# Altium PCB Node_ver2.PcbDoc
Units mm, origin at the board's own origin, x right, y up, seen from the top; angles counter-clockwise.
Board outline 75 x 55 mm, 2 copper layers (Top Layer, Bottom Layer); 51 components, 44 nets, 253 pads, 60 vias.
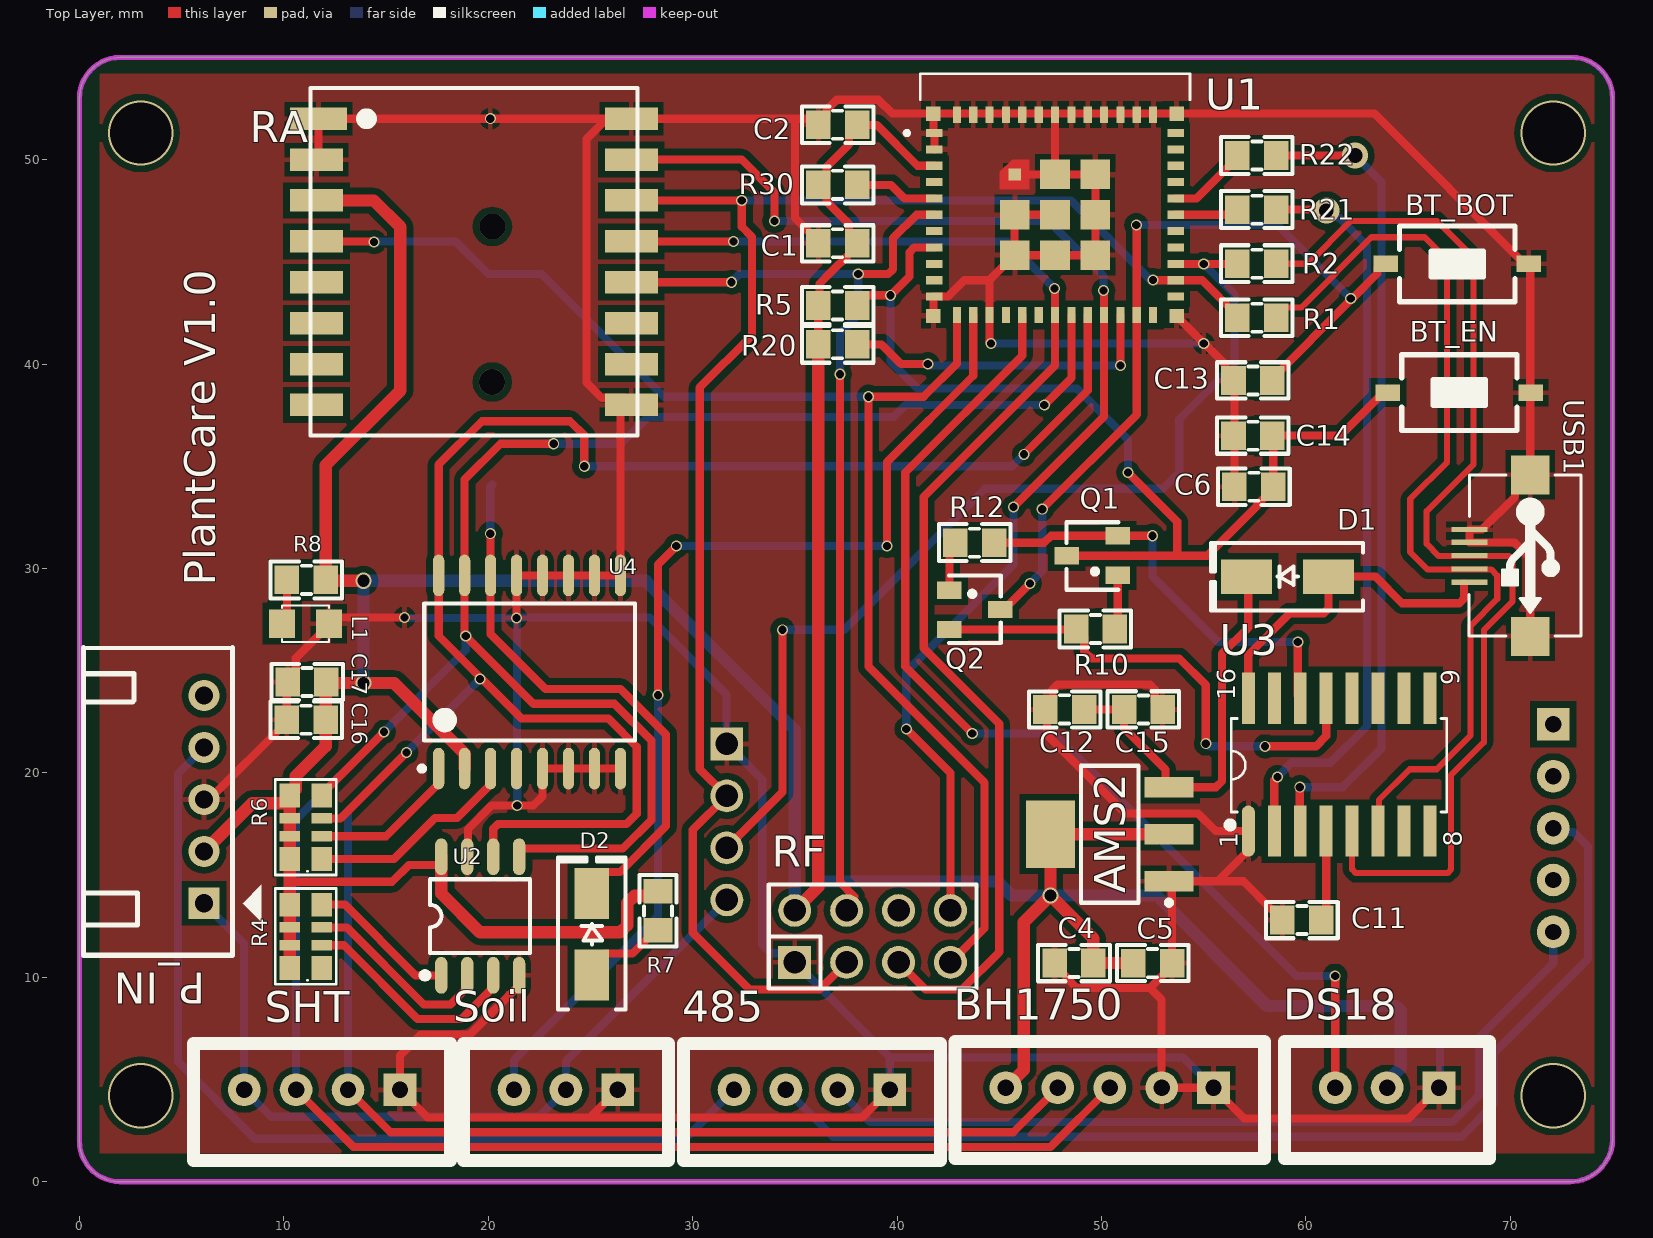
[diagram p0: Top Layer view]
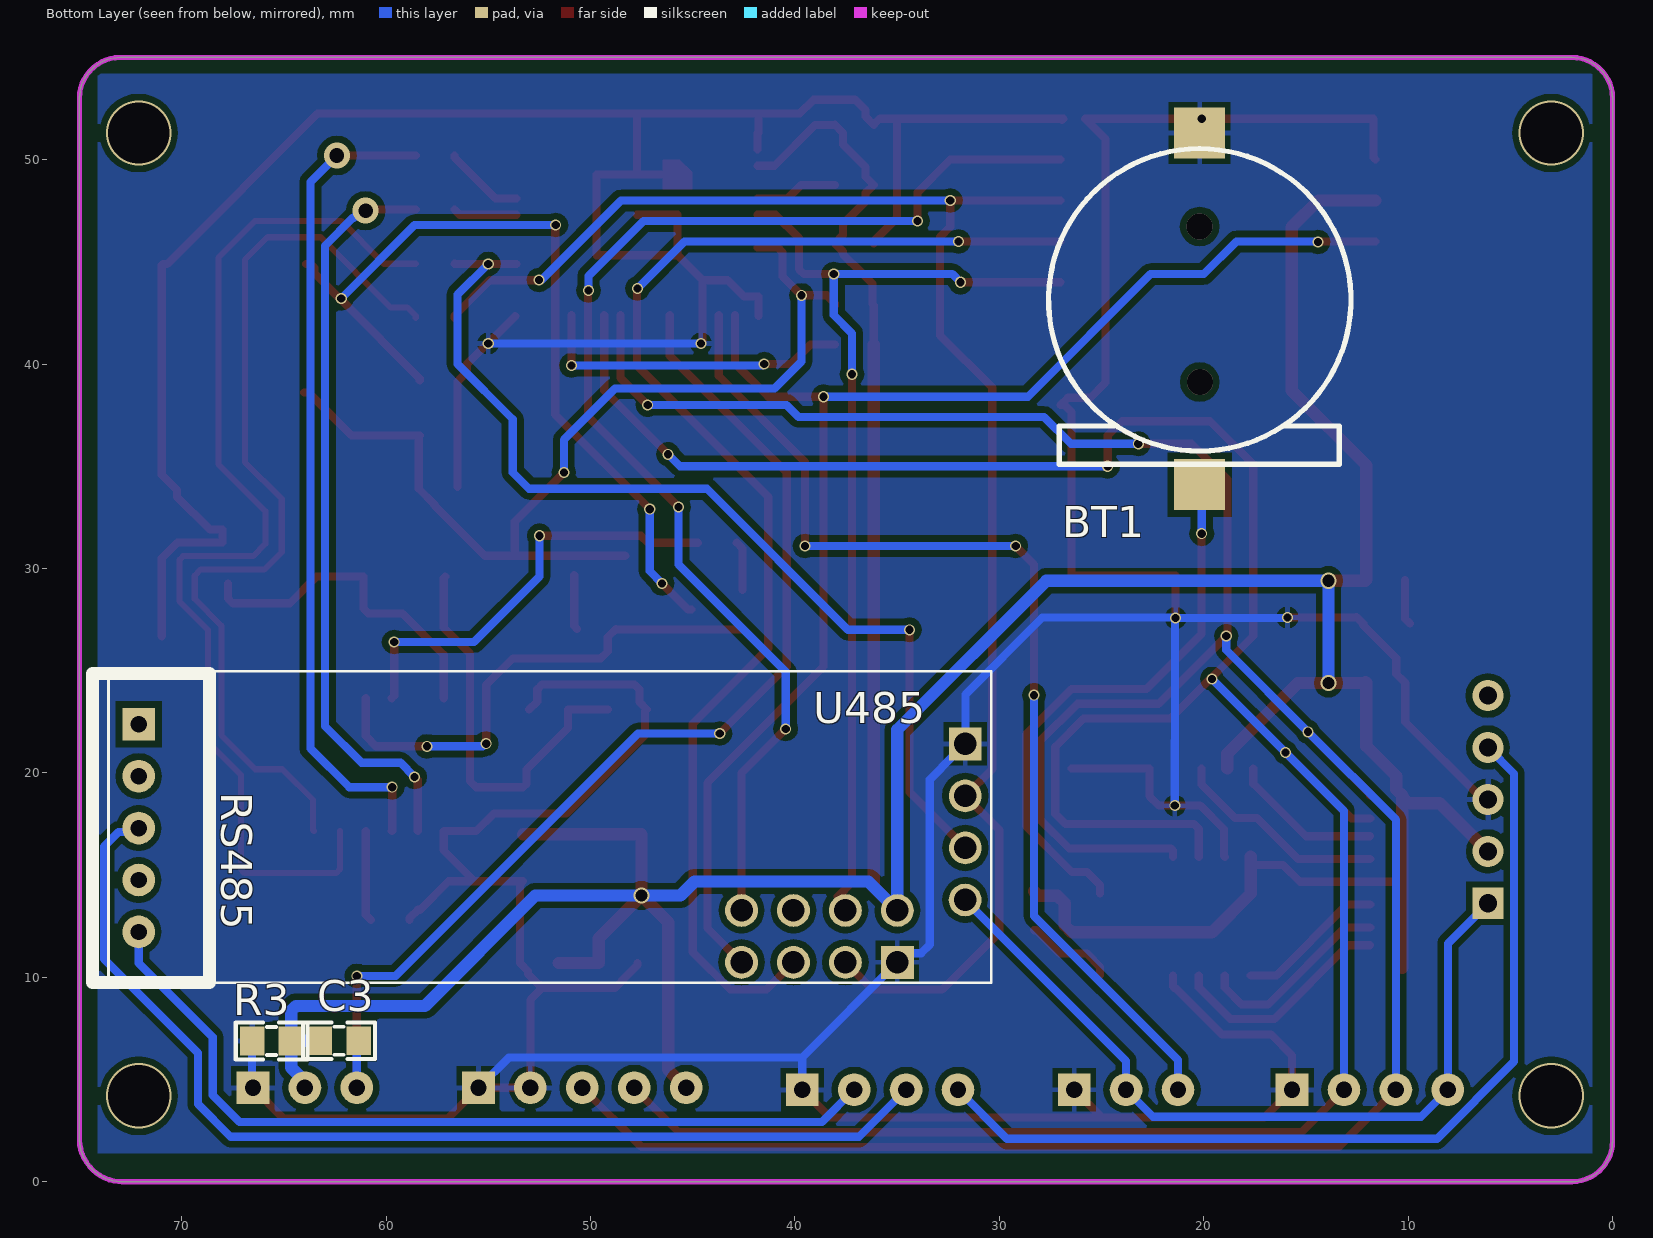
[diagram p1: Bottom Layer view, seen from below]
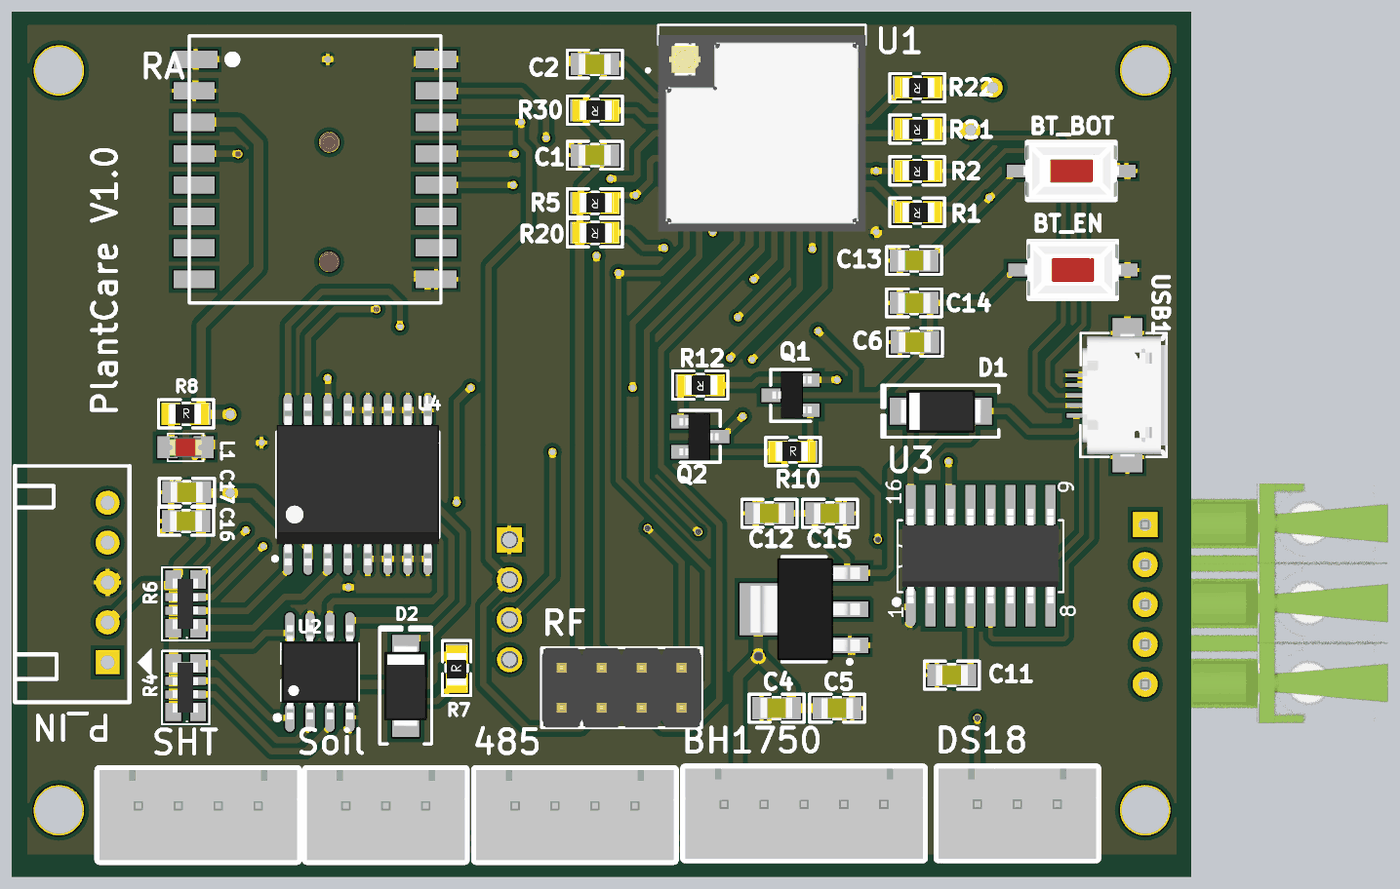
[diagram p2: 3D render of the assembled board from above, using the file's embedded part models]
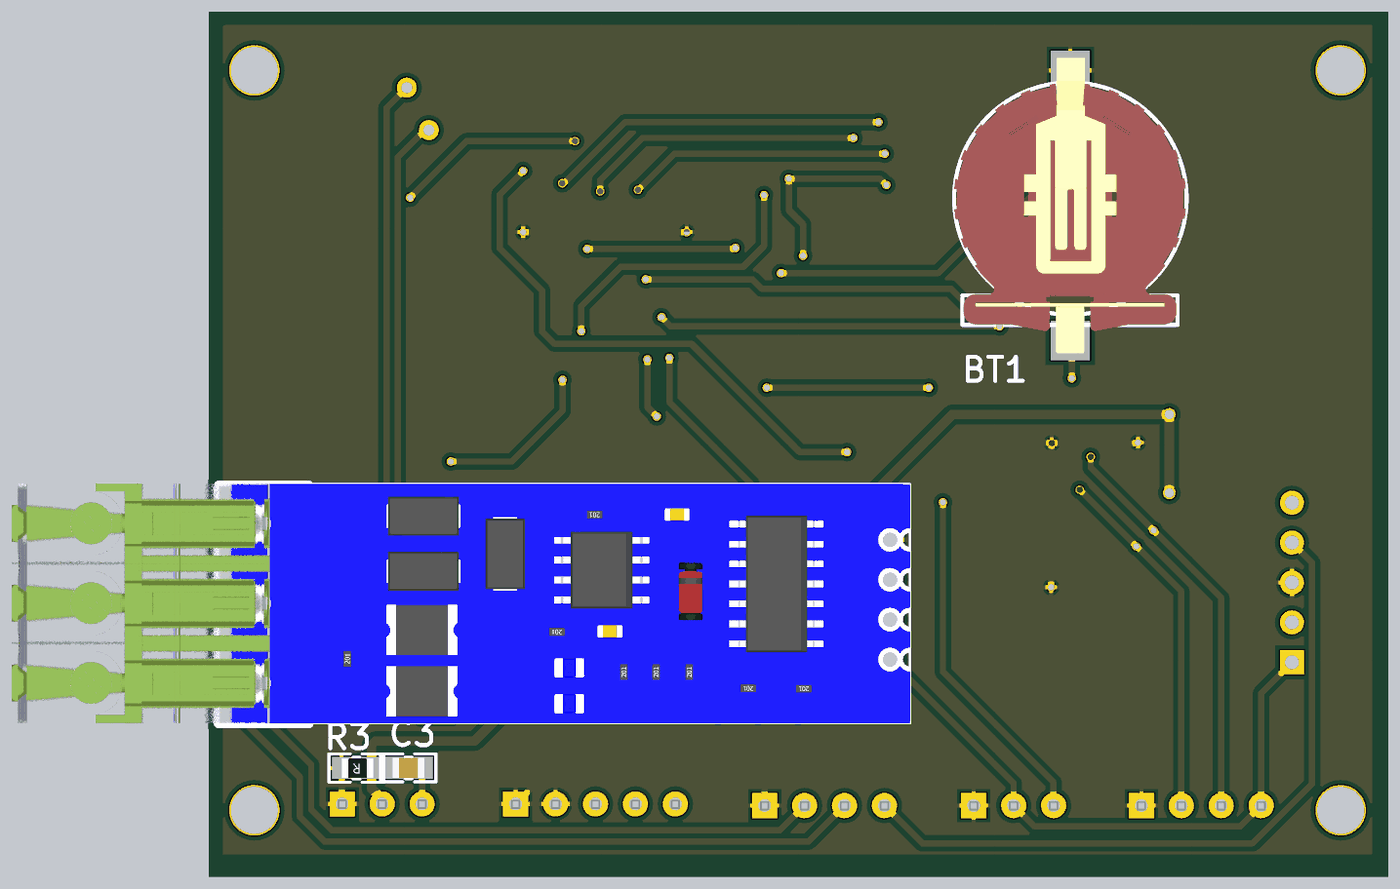
[diagram p3: 3D render of the assembled board from below, using the file's embedded part models]

## Layer stack, top to bottom
Top Solder: solder mask 0.0102, Solder Resist, Dk 3.5
Top Layer: signal copper 0.0356
Dielectric 1: dielectric 0.32, FR-4, Dk 4.8
Bottom Layer: signal copper 0.0356
Bottom Solder: solder mask 0.0102, Solder Resist, Dk 3.5

## Board outline
2,0 cw(c2,2) 0,2 0,53 cw(c2,53) 2,55 73,55 cw(c73,53) 75,53 75,2.047 74.999,2.046 cw(c72.9,2.1) 72.846,0.001 72.9,0

## Design rules (kind name [scope] priority, off if disabled: settings)
Clearance [All] p1: gap=0.32 ignorepadtopadclearanceinfootprint=FALSE
PolygonConnect [All] p1: connectstyle=Relief reliefconductorwidth=0.254 reliefentries=4 polygonreliefangle="90 Angle" airgapwidth=0.254
RoomDefinition Soil_temp [InComponentClass('Soil_temp')] p1: confinementstyle=ConfineIn formatcopy=TRUE lockcomponents=FALSE outline -33.5,-63.8 17.3,-63.8 17.3,-38.4 -33.5,-38.4
RoomDefinition Soil [InComponentClass('Soil')] p2: confinementstyle=ConfineIn formatcopy=TRUE lockcomponents=FALSE outline -33.5,-63.8 17.3,-63.8 17.3,-38.4 -33.5,-38.4
RoomDefinition SHT [InComponentClass('SHT')] p3: confinementstyle=ConfineIn formatcopy=TRUE lockcomponents=FALSE outline -33.5,-63.8 17.3,-63.8 17.3,-38.4 -33.5,-38.4
RoomDefinition RTC [InComponentClass('RTC')] p4: confinementstyle=ConfineIn formatcopy=TRUE lockcomponents=FALSE outline -33.5,-63.8 17.3,-63.8 17.3,-38.4 -33.5,-38.4
RoomDefinition RS485 [InComponentClass('RS485')] p5: confinementstyle=ConfineIn formatcopy=TRUE lockcomponents=FALSE outline -33.5,-63.8 17.3,-63.8 17.3,-38.4 -33.5,-38.4
RoomDefinition RA02 [InComponentClass('RA02')] p6: confinementstyle=ConfineIn formatcopy=TRUE lockcomponents=FALSE outline -33.5,-63.8 17.3,-63.8 17.3,-38.4 -33.5,-38.4
RoomDefinition ESP32C3-MINI [InComponentClass('ESP32C3-MINI')] p7: confinementstyle=ConfineIn formatcopy=TRUE lockcomponents=FALSE outline -33.5,-63.8 17.3,-63.8 17.3,-38.4 -33.5,-38.4
RoomDefinition BH1750 [InComponentClass('BH1750')] p8: confinementstyle=ConfineIn formatcopy=TRUE lockcomponents=FALSE outline -33.5,-63.8 17.3,-63.8 17.3,-38.4 -33.5,-38.4
RoutingCorners [All] p1: cornerstyle=45-Degree minsetback=2 maxsetback=2
RoutingVias [All] p1: holewidth=0.4 width=0.6 viastyle="Through Hole" minholewidth=0.25 minwidth=0.4 maxholewidth=1.1 maxwidth=1.27
SolderMaskExpansion [All] p1: expansion=0.102 istentingtop=FALSE
Width [All] p1: maxlimit=2 minlimit=0.2 preferedwidth=0.4
29 further rules are at their usual default settings.

## Classes and differential pairs
component class Soil: Soil
component class Soil_temp: C3 DS18 R3
component class SHT: SHT
component class RTC: BT1 C16 C17 D2 R4 R6 R7 U2 U4
component class RS485: 485 RS485 U485
component class RA02: RA RF
component class POWER: BT
component class ESP32C3-MINI: AMS2 BT_BOT BT_EN C1 C2 C4 C5 C6 C11 C12 C13 C14 C15 D1 L1 P_IN Q1 Q2 R1 R2 R5 R8 R10 R12 R20 R21 R22 R30 U1 U3 USB1
component class BH1750: BH1750

## Components (designator, comment, footprint, x,y, rotation, side; value= is the part's Value field where it differs from the comment)
485 "Header 4P 2.54 Duc Thang" XH2.54M-4 39.64,4.5 r180 top
AMS2 "AMS1117-3.3V" SOT223 50.4,17 r90 top value="AMS1117-3.3V SOT223"
BH1750 "Header 5P 2.54 Duc Thang" XH2.54M-5 55.48,4.6 r180 top
BT1 "CR1220 SMD" "DE PIN CR1220" 20.2,42.7 r180 bottom
BT_BOT "Nut Nhan 2 Chan SMD 3x6x2.5" "Nut Nhan 2 Chan SMD 3x6x2.5" 67.4,44.9 r0 top
BT_EN "Nut Nhan 2 Chan SMD 3x6x2.5" "Nut Nhan 2 Chan SMD 3x6x2.5" 67.5,38.6 r0 top
C1 "106" "tu 0805" 37.1,45.9 r180 top
C2 "104" "tu 0805" 37.1,51.7 r180 top
C3 "105" "tu 0805" 62.3,6.9 r180 bottom
C4 "106" "tu 0805" 48.654,10.697 r180 top
C5 "104" "tu 0805" 52.5,10.7 r0 top
C6 "105" "tu 0805" 57.454,33.997 r180 top
C11 "104" "tu 0805" 59.8,12.8 r180 top
C12 "106" "tu 0805" 48.2,23.1 r180 top
C13 "105" "tu 0805" 57.4,39.2 r0 top
C14 "105" "tu 0805" 57.4,36.5 r0 top
C15 "104" "tu 0805" 52.046,23.103 r0 top
C16 "104" "tu 0805" 11.1,22.6 r180 top
C17 "104" "tu 0805" 11.14,24.445 r180 top
D1 "SS34" "DIODE SMA" 59.1,29.6 r180 top
D2 "SS34" "DIODE SMA" 25.068,12.108 r90 top
DS18 "Header 3P 2.54 Duc Thang" XH2.54M-3 66.508,4.603 r180 top
L1 "LED 0805" LED-0805-Red 9.914,27.3 r0 top
P_IN "Header 5P 2.54 Duc Cong" "Header 5P DC 2.54" 6.1,13.62 r180 top
Q1 "BC817" SOT-23 49.55,30.613 r90 top value=C9014
Q2 "BC817" SOT-23 43.8,28 r270 top value=C9014
R1 "0R" "tro smd 0805" 57.6,42.2 r180 top
R2 "0R" "tro smd 0805" 57.6,44.846 r180 top
R3 "4.7k" "tro smd 0805" 65.6,6.824 r0 bottom
R4 "4.7k" "tro bang 0603 4" 11.098,11.981 r180 top
R5 "10k" "tro smd 0805" 37.097,42.8 r180 top
R6 "4.7k" "tro bang 0603 4" 11.098,17.315 r180 top
R7 "200R" "tro smd 0805" 28.243,13.251 r90 top
R8 "1k" "tro smd 0805" 11.1,29.5 r0 top
R10 "10k" "tro smd 0805" 49.7,27.1 r0 top
R12 "10k" "tro smd 0805" 43.8,31.2 r180 top
R20 "10k" "tro smd 0805" 37.097,40.9 r180 top
R21 "0R" "tro smd 0805" 57.6,47.493 r180 top
R22 "0R" "tro smd 0805" 57.6,50.139 r180 top
R30 "10k" "tro smd 0805" 37.097,48.7 r180 top
RA "RA-02" RA-02 19.3,45 r0 top
RF "JP 2x4 2.54" "JP 2x4 DT" 38.8,12 r0 top
RS485 "Header 5P 2.54 Duc Thang" XH2.54M-5 72.1,22.38 r270 bottom
SHT "Header 4P 2.54 Duc Thang" XH2.54M-4 15.68,4.5 r180 top
Soil "Header 3P 2.54 Duc Thang" XH2.54M-3 26.34,4.5 r180 top
U1 "ESP32-C3-MINI-1U-N4" XCVR_ESP32-C3-MINI-1U-N4 47.725,47.3 r0 top
U2 "M95080" SOP8_L 19.607,12.997 r90 top
U3 "CH340C" SOIC16_50_284_25X90_SMT 61.6,20.4 r90 top
U4 "DS3231 SMD" "SOIC 16" 22.02,24.935 r90 top
U485 "Module rs485" RS485 62.398,17.734 r180 bottom locked
USB1 "USB Micro 5p SMD" "USB Micro 5p SMD" 68,30.63 r270 top

## Footprints (in the part's own frame and the unit in brackets; to place one, negate y for a bottom-side part, rotate by r counter-clockwise, add the part's x,y. Pads: shape width x height; smd on the part's side, far side on the other; paste and mask are expansions set on the pad)
"DE PIN CR1220" [mm]
  rect 2.5x2.5 smd: 1(0,-8.6) 2(0,8.6)
  silkscreen extent -7.39,-7.6 7.4,7.84, body extent -7.39,-9.42 7.36,9.38, height 4.27
"DIODE SMA" [mm] "SMA"
  rect 2.5x1.7 smd: 1(-2,0) 2(2,0)
  silkscreen extent -3.68,-1.65 3.75,1.65, body extent -2.6,-1.37 2.6,1.37, height 2.4
"Header 5P DC 2.54" [mil]
  rect 60x60 hole 35: 1(0,0)
  round 60 hole 35: 2(0,-100) 3(0,-200) 4(0,-300) 5(0,-400)
  silkscreen extent -110,-492 232,100
"JP 2x4 DT" [mm]
  rect 1.61x1.6 hole 1.1: 1(-3.81,-1.27)
  oval 1.61x1.6 hole 1.1: 2(-1.27,-1.27) 3(1.27,-1.27) 4(3.81,-1.27) 5(3.81,1.27) 6(1.27,1.27) 7(-1.27,1.27) 8(-3.81,1.27)
  silkscreen extent -5.08,-2.54 5.08,2.54, body extent -5.08,-2.54 5.08,2.54, height 8.55
LED-0805-Red [mil]
  rect 50x55 smd: 1(0,0) 2(90,0)
  silkscreen extent 0,-35 90,35, body extent 5,-25 85,25, height 43
"Nut Nhan 2 Chan SMD 3x6x2.5" [mm] "Switch SMD type"
  rect 1.2x0.8 smd: 1(-3.5,0) 2(3.5,0)
  silkscreen extent -2.82,-1.85 2.82,1.85, body extent -3.05,-1.85 3.05,1.85, height 2.5
RA-02 [mm]
  rect 2.8x1.1 smd: 1(-7.6,7)
  rect 2.6x1.1 smd: 2(-7.7,5) 3(-7.7,3) 4(-7.7,1) 5(-7.7,-1) 6(-7.7,-3) 7(-7.7,-5) 8(-7.7,-7) 9(7.7,-7) 10(7.7,-5) 11(7.7,-3) 12(7.7,-1) 13(7.7,1) 14(7.7,3) 15(7.7,5) 16(7.7,7)
  silkscreen extent -8,-8.5 8,8.5
RS485 [mm]
  round 1.6 hole 1.1: 4(30.723,-3.951) 5(30.738,-1.404) 6(30.732,1.139)
  rect 1.6x1.6 hole 1.1: 7(30.736,3.682)
  silkscreen extent -11.18,-8 32,7.24, body extent -25.13,-8 32,7.27, height 19.67
SOIC16_50_284_25X90_SMT [mm]
  oval 2.5x0.635 smd mask+0.076: 1(-3.25,4.42)
  rect 2.5x0.635 smd mask+0.076: 2(-3.25,3.15) 3(-3.25,1.88) 4(-3.25,0.61) 5(-3.25,-0.66) 6(-3.25,-1.93) 7(-3.25,-3.2) 8(-3.25,-4.47) 9(3.25,-4.47) 10(3.25,-3.2) 11(3.25,-1.93) 12(3.25,-0.66) 13(3.25,0.61) 14(3.25,1.88) 15(3.25,3.15) 16(3.25,4.42)
  silkscreen extent -3.07,-5.3 2.26,5.44, body extent -3.02,-4.97 2.98,4.93, height 1.4
"SOIC 16" [mm] "SOIC, 16-Leads, Body 10.30x7.50mm, Pitch 1.27mm, IPC Medium Density"
  oval 2.032x0.55 smd: 1(-4.725,4.445) 2(-4.725,3.175) 3(-4.725,1.905) 4(-4.725,0.635) 5(-4.725,-0.635) 6(-4.725,-1.905) 7(-4.725,-3.175) 8(-4.725,-4.445) 9(4.725,-4.445) 10(4.725,-3.175) 11(4.725,-1.905) 12(4.725,-0.635) 13(4.725,0.635) 14(4.725,1.905) 15(4.725,3.175) 16(4.725,4.445)
  silkscreen extent -4.85,-5.15 3.35,5.39, body extent -5.15,-5.17 5.16,5.16, height 2.48
SOP8_L [mm] "SOIC, 8-Leads, Body 4.9x3.9mm, Pitch 1.27mm, IPC High Density"
  oval 1.8x0.6 smd: 1(-2.9,1.905) 2(-2.9,0.635) 3(-2.9,-0.635) 4(-2.9,-1.905) 5(2.9,-1.905) 6(2.9,-0.635) 7(2.9,0.635) 8(2.9,1.905)
  silkscreen extent -3.2,-2.44 1.8,3, body extent -3.01,-2.45 2.99,2.45, height 1.75
SOT223 [mm]
  rect 1x2.4 smd: 1(-2.3,-2.9) 2(0,-2.9) 3(2.3,-2.9)
  rect 3.3x2.4 smd: 4(0,2.9)
  silkscreen extent -3.47,-3.03 3.35,1.4, body extent -3.25,-3.56 3.25,3.4, height 1.68
SOT-23 [mm] "SOT 23 _ 1-3-2"
  rect 0.85x1.2 smd: 1(-0.94,-1.245) 2(0.986,-1.25) 3(0.005,1.25)
  silkscreen extent -1.65,-1.27 1.65,1.27, body extent -1.47,-1.33 1.53,1.17, height 1.06
"tro bang 0603 4" [mil]
  rect 39.37x45.67 smd: 1(-30,60) 4(-30,-62) 5(32,-62) 8(32,60)
  rect 39.37x20 smd: 2(-30.06,16.08) 3(-30,-18.08) 6(32.06,-18.08) 7(32.06,16.08)
  silkscreen extent -58,-93 60,91, body extent -29,-64 33,62, height 22
"tro smd 0805" [mm]
  rect 1.2x1.4 smd: 1(-0.946,-0.061) 2(0.954,-0.061)
  silkscreen extent -1.75,-0.97 1.75,0.84, body extent -1.56,-0.76 1.44,0.64, height 0.53
"tu 0805" [mm] "Compoment SMD 80x50mil"
  rect 1.2x1.4 smd: 1(-0.946,-0.003) 2(0.954,-0.003)
  silkscreen extent -1.75,-0.89 1.75,0.89, body extent -1.01,-0.64 1.01,0.63, height 0.61
"USB Micro 5p SMD" [mil]
  rect 10x70 smd: 1(51.18,0) 2(25.59,0) 3(0,0) 4(-25.59,0) 5(-50,0)
  rect 74.8x74.8 smd: 5(-155.51,116.84) 5(155.51,116.84)
  silkscreen extent -155,-1 155,215, body extent -157,5 158,218, height 107
XCVR_ESP32-C3-MINI-1U-N4 [mm]
  rect 0.8x0.4 smd: 1(-5.9,4) 2(-5.9,3.2) 3(-5.9,2.4) 4(-5.9,1.6) 5(-5.9,0.8) 6(-5.9,0) 7(-5.9,-0.8) 8(-5.9,-1.6) 9(-5.9,-2.4) 10(-5.9,-3.2) 11(-5.9,-4) 25(5.9,-4) 26(5.9,-3.2) 27(5.9,-2.4) 28(5.9,-1.6) 29(5.9,-0.8) 30(5.9,0) 31(5.9,0.8) 32(5.9,1.6) 33(5.9,2.4) 34(5.9,3.2) 35(5.9,4)
  rect 0.4x0.8 smd: 12(-4.8,-4.9) 13(-4,-4.9) 14(-3.2,-4.9) 15(-2.4,-4.9) 16(-1.6,-4.9) 17(-0.8,-4.9) 18(0,-4.9) 19(0.8,-4.9) 20(1.6,-4.9) 21(2.4,-4.9) 22(3.2,-4.9) 23(4,-4.9) 24(4.8,-4.9) 36(4.8,4.9) 37(4,4.9) 38(3.2,4.9) 39(2.4,4.9) 40(1.6,4.9) 41(0.8,4.9) 42(0,4.9) 43(-0.8,4.9) 44(-1.6,4.9) 45(-2.4,4.9) 46(-3.2,4.9) 47(-4,4.9) 48(-4.8,4.9)
  rect 0.6x0.6 smd paste-1 mask+0: 49_1(-1.975,1.975)
  rect 1.45x1.45 smd: 49_2(0,1.975) 49_3(1.975,1.975) 49_4(1.975,0) 49_5(1.975,-1.975) 49_6(0,-1.975) 49_7(-1.975,-1.975) 49_8(-1.975,0) 49_9(0,0)
  rect 0.7x0.7 smd: 50(5.95,4.95) 51(5.95,-4.95) 52(-5.95,-4.95) 53(-5.95,4.95)
  Top Layer region: -1.25,1.25 -2.7,1.25 -2.7,2.1 -2.1,2.7 -1.25,2.7
  silkscreen extent -7.35,3.9 6.6,6.9, body extent -6.6,-6.25 6.6,6.25, height 2.55
XH2.54M-3 [mm]
  rect 1.6x1.6 hole 0.8: 1(0,0)
  round 1.6 hole 0.8: 2(2.54,0) 3(5.08,0)
  silkscreen extent -2.48,-2.26 7.56,3.46, body extent -2.48,-2.26 7.56,3.48, height 6.91
XH2.54M-4 [mm]
  rect 1.6x1.6 hole 0.8: 1(0,0)
  round 1.6 hole 0.8: 2(2.54,0) 3(5.08,0) 4(7.62,0)
  silkscreen extent -2.48,-2.26 10.1,3.46, body extent -2.48,-2.26 10.1,3.48, height 6.91
XH2.54M-5 [mm]
  rect 1.6x1.6 hole 0.8: 1(0,0)
  round 1.6 hole 0.8: 2(2.54,0) 3(5.08,0) 4(7.62,0) 5(10.16,0)
  silkscreen extent -2.48,-2.26 12.64,3.46, body extent -2.48,-2.26 12.64,3.48, height 6.91

## Part data
485 BH1750 DS18 P_IN RS485 SHT Soil: "Cắm", Chung_Loai=Cắm, Don_Vi=Con
  485 SHT: Ma_Hang=MH001285, Ten_Linh_Kien="Header 4P XH2.54-4P Đực Thẳng"
  BH1750 RS485: Ma_Hang=MH001298, Ten_Linh_Kien="Header 5P XH2.54-5P Đực Thẳng"
  DS18 Soil: Ma_Hang=MH001292, Ten_Linh_Kien="Header 3P XH2.54-3P Đực Thẳng"
  P_IN: Ma_Hang=MH001308, Ten_Linh_Kien="Header 5P XH2.54-5P Đực Cong"
AMS2: library part "AMS1117 SMD", "Dán", Chung_Loai=Dán, Don_Vi=Con, Ma_Hang=MH000596
BT1: library part "De pin CR1220 SMD", Ma_Hang=MH000833, Ten="Đế PIN CR1220 SMD"
C1 C4 C12: library part "Tu 0805 106 16V 10%", "Dán", Chung_Loai=Dán, Don_Vi=Con, Ma_Hang=MH004553, So_Chan=2, Ten_Linh_Kien="Tụ 0805 106-10uF 10% 16V"
C2 C5 C11 C15 C16 C17: library part "Tu 0805 104 50V 10%", "Dán", Chung_Loai=Dán, Don_Vi=Con, Ma_Hang=MH004551, So_Chan=2, Ten_Linh_Kien="Tụ 0805 104-100nF 10% 50V"
C3 C6 C13 C14: library part "Tu 0805 105 50V 10%", "Dán", Chung_Loai=Dán, Don_Vi=Con, Ma_Hang=MH004552, So_Chan=2, Ten_Linh_Kien="Tụ 0805 105-1uF 10% 50V"
D1 D2: library part "Diode SS34 ( 1N5822 )", "Dán", Chung_Loai=Dán, Don_Vi=Con, Ma_Hang=MH002104, Ten_Linh_Kien="Diode SS34 3A 40V SMA ( 1N5822 SS34A)"
L1: library part "LED 0805 Do", "Dán", Chung_Loai=Dán, Don_Vi=Con, Ma_Hang=MH000897, Ten_Linh_Kien="LED 0805 Màu Đỏ (Red)"
Q1 Q2: library part "Trans BC817", "SOT-23 - C8658"
R1 R2 R21 R22: library part "Tro 0805 5% 0R", "Dán", Chung_Loai=Dán, Don_Vi=Con, Ma_Hang=MH005230, So_Chan=2, Ten_Linh_Kien="Trở 0805 5% 0R"
R3: library part "Tro 0805 5% 4.7k", "Dán", Chung_Loai=Dán, Don_Vi=Con, Ma_Hang=MH005307, So_Chan=2, Ten_Linh_Kien="Trở 0805 5% 4.7k"
R4 R6: library part "Tro bang 0603 4.7k", "Dán", Chung_Loai=Dán, Don_Vi=Con, Ma_Hang=MH001448, So_Chan=8, Ten_Linh_Kien="Trở băng 0603x4 4.7k"
R5 R10 R12 R20 R30: library part "Tro 0805 1% 10k", "Dán", Chung_Loai=Dán, Don_Vi=Con, Ma_Hang=MH005473, So_Chan=2, Ten_Linh_Kien="Trở 0805 1% 10k"
R7: library part "Tro 0805 5% 220R", "Dán", Chung_Loai=Dán, Don_Vi=Con, Ma_Hang=MH005259, So_Chan=2, Ten_Linh_Kien="Trở 0805 5% 220R"
R8: library part "Tro 0805 1% 1k", "Dán", Chung_Loai=Dán, Don_Vi=Con, Ma_Hang=MH005468, So_Chan=2, Ten_Linh_Kien="Trở 0805 1% 1k"
RA: "General ISM < 1GHz LoRaâ„¢ Transceiver Module 410MHz ~ 525MHz Antenna Not Included, I-PEX Surface Mount", Package=None, Availability="Not in stock", Check_prices=https://www.snapeda.com/parts/RA-02/AI-Thinker/view-part/?ref=eda, MF=Ai-Thinker, MP=RA-02, Price=None, SnapEDA_Link=https://www.snapeda.com/parts/RA-02/AI-Thinker/view-part/?ref=snap
RF: library part "JP 2x4 2.54 Duc Thang", "Cắm", Chung_Loai=Cắm, Don_Vi=Con, Ma_Hang=MH002686, Ten_Linh_Kien="Jump Đôi Đực 2.54MM 2x40P Thẳng 11MM"
U1: "Bluetooth, WiFi 802.11b/g/n, Bluetooth v5.0 Transceiver Module 2.412GHz ~ 2.484GHz Antenna Not Included, I-PEX Surface Mount", Package=None, Availability="In Stock", Check_prices=https://www.snapeda.com/parts/ESP32-C3-MINI-1U-N4/Espressif+Systems/view-part/?ref=eda, MF="Espressif Systems", MP=ESP32-C3-MINI-1U-N4, Price=None, Purchase-URL=https://pricing.snapeda.com/search/part/ESP32-C3-MINI-1U-N4/?ref=eda, SnapEDA_Link=https://www.snapeda.com/parts/ESP32-C3-MINI-1U-N4/Espressif+Systems/view-part/?ref=snap
U2: library part EEPROM_M95080, "EEPROM_M95080"
U3: library part IC_CH340C, "USB Bridge, USB to UART USB 2.0 UART Interface", Alternate Part Number-1=NA, Case/Package=SOIC16, Manufacturer=Olimex, Supplier Part Number-1=C84681, Manufacturer Part Number=CH340C, Supplier-1=LCSC
U4: "SOIC"
USB1: "USB Type B", Ma_Hang=MH001020, Ten="MicroUSB MK5P SMD"
BT_BOT BT_EN: Ma_Hang=MH001036, Ten="Nút Nhấn 2 Chân 3x6x2.5MM SMD"

## Via types
v1: diameter 0.54, hole 0.4, Top Layer to Bottom Layer, 49 vias
v2: diameter 3.2, hole 3, Top Layer to Bottom Layer, 4 vias
v3: diameter 0.8, hole 0.6, Top Layer to Bottom Layer, 3 vias
v4: diameter 1.27, hole 0.711, Top Layer to Bottom Layer, 2 vias
v5: diameter 1.27, hole 1.27, Top Layer to Bottom Layer, 2 vias

## Nets (pads, with @x,y where several pads share a name; then routed paths per layer and width w, separated by ;. In a path a pad name is that pad's centre, name@x,y a point inside that pad or via, vN(x,y) a via of type N, cw(c..) or ccw(c..) an arc to the next point about the centre after c; other vN are vias at no path point)
BAT_11V6: 485.4 P_IN.4 | length 45.7
  Bottom Layer w0.4: P_IN.4 4.818,19.958 4.818,5.875 8.593,2.1 29.62,2.1 485.4
CHIP_EN: BT_EN.1 C6.1 C14.2 Q1.3 R5.1 U1.8 | length 49.4
  Top Layer w0.4: R5.1 38.043,42.961 38.443,43.361 v1(39.683,43.361) 40.601,44.278 40.601,45.466 40.835,45.7 U1.8 ; Q1.3 49.979,30.618 51.61,30.618 53.7,30.618 ; v1(51.3,34.7) 53.7,32.3 53.7,30.618 ; BT_EN.1 63.8,38.6 61.697,36.497 C14.2 58.4,36.451 C6.1 58.4,33.9 57.62,33.12 57.62,33.085 55.153,30.618 53.7,30.618
  Bottom Layer w0.4: v1(39.683,43.361) 39.683,40.117 41,38.8 48.8,38.8 51.3,36.3 v1(51.3,34.7)
DN: R1.1 U3.6 USB1.2 | length 46
  Top Layer w0.3: R1.1 58.546,42.361 58.946,42.761 59.761,42.761 63.2,46.2 65.8,46.2 66.9,45.1 66.9,35.2 65.1,33.4 65.1,30.8 65.943,29.957 68,29.957 69.054,29.957 69.359,29.652 69.359,28.513 68.054,27.208 68.054,21.836 66.398,20.18 65.077,20.18 63.571,18.674 63.571,17.191 U3.6
DP: R2.1 U3.5 USB1.3 | length 54
  Top Layer w0.3: R2.1 60.107,44.907 62.2,47 66.4,47 68.2,45.2 68.2,35.1 65.9,32.8 65.9,31.2 66.493,30.607 68.739,30.607 69.1,30.607 69.924,30.607 70.1,30.431 70.1,28.377 68.7,26.977 68.7,21.5 67.1,19.9 67.1,15.276 66.924,15.1 62.436,15.1 62.26,15.276 U3.5
DTR: Q2.2 R10.1 U3.13 | length 24.9
  Top Layer w0.4: Q2.2 R10.1@48.679,27.015 ; R10.1 49.154,26.639 49.154,25.946 49.5,25.6 53.8,25.6 55.101,24.299 v1(55.101,21.429) ; v1(58,21.3) 60.49,21.3 60.99,21.8 U3.13
  Bottom Layer w0.4: v1(55.101,21.429) 55.139,21.429 55.268,21.3 v1(58,21.3)
GND: 485.1 AMS2.1 BH1750.1 BH1750.2 BT1.2 BT_BOT.2 BT_EN.2 C1.2 C2.2 C4.2 C5.2 C6.2 C11.2 C12.2 C13.1 C14.1 C15.2 C16.2 C17.2 DS18.1 L1.2 P_IN.3 R3.2 RA.1 RA.2 RA.9 RA.16 RF.1 SHT.1 Soil.1 U1.1 U1.2 U1.11 U1.14 U1.36 U1.37 U1.38 U1.39 U1.40 U1.41 U1.42 U1.43 U1.44 U1.45 U1.46 U1.47 U1.48 U1.49_1 U1.49_2 U1.49_3 U1.49_4 U1.49_5 U1.49_6 U1.49_7 U1.49_8 U1.49_9 U1.50 U1.51 U1.52 U1.53 U2.4 U2.7 U3.1 U4.5 U4.6 U4.7 U4.8 U4.9 U4.10 U4.11 U4.12 U4.13 U485.7 USB1.4 USB1.5 | length 366.3
  Top Layer w0.4: P_IN.3 6.342,18.7 10.146,22.503 C16.2 10.146,24.408 C17.2 10.586,24.848 10.586,25.623 12.2,27.236 L1.2 12.525,27.625 12.55,27.6 v1(15.9,27.6) ; RA.2 11.7,50.1 RA.1 v1(20.1,52) 25.8,52 24.8,51 24.8,39.1 25.55,38.35 26.65,38.35 RA.9 26.815,38 26.465,37.65 U4.9 U4.10 U4.11 U4.12 U4.13 21.376,29.651 v1(21.376,27.576) ; U2.7 19.01,15.935 19.01,17.242 20.168,18.4 v1(21.417,18.4) 22.2,18.4 22.655,18.855 U4.5 U4.6 U4.7 U4.8 ; U2.4 21.512,9.551 21.42,9.459 21.358,9.459 21.062,9.163 21.062,9.157 19.105,7.2 16.7,7.2 15.68,6.18 SHT.1 17.04,3.14 24.98,3.14 ; Soil.1 24.98,3.14 ; RA.16@26.869,52 26.934,51.934 RA.16 35,52 ; C1.2 36.146,46.003 35,47.149 35,52 ; 485.1 38.28,3.14 24.98,3.14 ; U1.52 41.775,43.3 U1.11 42.49,43.3 43.29,44.1 44.525,44.1 ; U1.2 U1.1 41.775,51.3 U1.53 ; v1@44.5,41.1 v1(44.6,41) 44.6,41.038 44.525,41.113 U1.14 44.525,44.1 ; U1.49_1 U1.49_2 ; C4.2 47.7,10.6 48.48,9.82 48.48,9.785 48.788,9.477 52.37,9.477 ; U1.49_9 U1.49_8 U1.49_7 ; U1.42 U1.49_2 ; C15.2 52.6,23.5 52.6,24.089 52.366,24.323 47.843,24.323 47.608,24.089 47.608,23.466 C12.2 47.337,23.012 47.337,21.863 51.18,18.02 54.715,18.02 55.585,17.15 U3.1 57.18,16.218 55.662,14.7 ; U1.51 56.054,39.971 56.054,39.597 C13.1 56.5,39.151 C6.2 ; C11.2 58.846,12.903 58.446,13.303 58.346,13.303 56.949,14.7 55.662,14.7 ; DS18.1 65.005,3.1 56.98,3.1 BH1750.1 BH1750.2 52.94,8.906 52.37,9.477 ; USB1.5@70.968,26.68 70.968,30.511 70.202,31.277 68.003,31.277 USB1.4 68,31.9 68.616,31.9 70.218,33.502 70.218,33.83 70.968,34.58 70.968,44.832 BT_BOT.2 70.7,44.9 63.35,52.25 U1.50 U1.53 ; 35,52 35.849,52 C2.2 36.546,52.103 36.546,52.424 37.044,52.923 39.091,52.923 39.764,52.25 U1.53 ; 44.525,44.1 U1.49_7 ; U1.49_7 U1.49_6 U1.49_5 U1.49_4 U1.49_3 U1.49_2 ; 52.37,9.477 53.054,10.161 53.054,10.297 C5.2 53.454,14.546 AMS2.1 55.662,14.7
  Bottom Layer w0.4: v1(15.9,27.6) 15.924,27.576 v1(21.376,27.576) ; 21.4,21.573 21.4,27.551 v1(21.376,27.576) ; v1(21.417,18.4) 21.417,21.573 ; 485.1 39.64,6.085 ; v1(44.6,41) v1(55,41) ; BH1750.1 53.995,6.085 39.64,6.085 ; DS18.1 66.554,4.649 R3.2 ; v1(21.376,27.576) 21.395,27.557 21.438,27.6 27.9,27.6 31.662,23.838 U485.7 32.262,20.816 33.4,19.678 33.4,11.6 33.819,11.181 34.539,11.181 RF.1 34.995,10.73 39.64,6.085
GPIO0: RA.4 RF.4 U1.12 | length 68.3
  Top Layer w0.4: RA.4 14.388,46 v1(14.413,45.975) ; RF.4 44.28,12.4 44.28,19.52 38.6,25.2 v1(38.6,38.4) 41.3,38.4 42.925,40.025 U1.12
  Bottom Layer w0.4: v1(14.413,45.975) 14.438,46 18.4,46 20,44.4 22.6,44.4 28.6,38.4 v1(38.6,38.4)
GPIO1: Soil.3 U1.13 | length 53.2
  Top Layer w0.4: v1(28.3,23.8) 28.3,30.2 v1(29.2,31.1) ; v1(39.5,31.1) 39.5,35.2 43.725,39.425 U1.13
  Bottom Layer w0.4: Soil.3 21.26,5.96 28.3,13 v1(28.3,23.8) ; v1(29.2,31.1) v1(39.5,31.1)
GPIO2: R30.1 U1.5 | length 4.1
  Top Layer w0.4: R30.1 39.704,48.761 40.364,48.1 U1.5
GPIO3: RA.12 RF.7 U1.6 | length 49
  Top Layer w0.4: RA.12 v1(31.9,44) ; v1(37.2,39.5) 37.2,14.66 37.9,13.96 37.53,13.59 RF.7 ; v1(38.1,44.4) 39.566,44.4 39.8,44.634 39.8,46.158 40.942,47.3 U1.6
  Bottom Layer w0.4: v1(31.9,44) 32.3,44.4 v1(38.1,44.4) 38.1,42.4 37.2,41.5 v1(37.2,39.5)
GPIO4: RA.13 RF.3 U1.18 | length 64.5
  Top Layer w0.4: RA.13 v1(32,46) ; RF.3 40.075,10.73 41.395,9.41 43.162,9.41 45,11.248 45,22.4 41.3,26.1 41.3,33.5 47.725,39.925 U1.18 47.725,43.675 v1(47.7,43.7)
  Bottom Layer w0.4: v1(32,46) 45.4,46 v1(47.7,43.7)
GPIO5: BH1750.3 R6.4 SHT.3 U1.19 U2.5 U4.15 | length 137.1
  Top Layer w0.4: SHT.3 13.4,1.7 47.5,1.7 BH1750.3 ; R6.4 11.86,18.97 v1(14.9,22.01) ; U2.5 21.512,16.205 21.604,16.297 26.579,16.297 27.98,17.698 27.98,21.579 26.178,23.38 22.22,23.38 18.845,26.755 U4.15 18.845,34.345 20.6,36.1 v1(23.2,36.1) ; v1(47.2,38) 48.525,39.325 U1.19
  Bottom Layer w0.4: SHT.3 10.6,17.71 v1(14.9,22.01) 18.9,26.01 v1(18.9,26.7) ; v1(23.2,36.1) 26.5,36.1 27.81,37.41 39.827,37.41 40.417,38 v1(47.2,38)
GPIO6: BH1750.4 R6.3 SHT.2 U1.20 U2.6 U4.16 | length 139.5
  Top Layer w0.4: R6.3 12.774,17.774 v1(16,21) ; SHT.2 15.22,2.42 45.68,2.42 BH1750.4 ; v1@19.641,24.641 21.622,22.66 ; U2.6 20.242,17.266 20.476,17.5 26.764,17.5 27.26,17.996 27.26,21.28 25.88,22.66 21.622,22.66 ; v1(24.7,35) 24.7,36.5 24,37.2 19.7,37.2 17.575,35.075 U4.16 17.575,26.707 21.622,22.66 ; v1(46.2,35.585) 49.325,38.71 U1.20
  Bottom Layer w0.4: SHT.2 13.14,18.14 v1(16,21) v1(19.6,24.6) ; v1(24.7,35) 45.615,35 v1(46.2,35.585)
GPIO7: RA.15 RF.5 U1.21 | length 62.2
  Top Layer w0.4: RA.15 31.5,50 32.4,50 34,48.4 v1(34,47) ; v1(40.45,22.15) 42.61,19.99 RF.5 ; v1(45.7,33) 50.125,37.425 U1.21 50.125,43.575 v1(50.1,43.6)
  Bottom Layer w0.4: v1(34,47) 47.4,47 50.1,44.3 v1(50.1,43.6) ; v1(40.45,22.15) 40.45,24.95 45.7,30.2 v1(45.7,33)
GPIO8: R20.1 U1.22 | length 15.8
  Top Layer w0.4: R20.1 39.239,40.961 40.2,40 v1(41.5,40) ; v1(50.925,39.935) U1.22
  Bottom Layer w0.4: v1(41.5,40) 41.565,39.935 v1(50.925,39.935)
GPIO9: BT_BOT.1 C13.2 Q2.3 U1.23 | length 41.8
  Top Layer w0.4: Q2.3 45.225,27.995 v1(46.5,29.27) ; v1(47.1,32.9) 51.725,37.525 U1.23 51.725,46.775 v1(51.7,46.8) ; C13.2 58.354,39.297 62.163,43.105 62.163,43.173 v1(62.19,43.2) ; v1@62.224,43.166 63.5,44.442 63.5,44.7 63.7,44.9 BT_BOT.1
  Bottom Layer w0.4: v1(46.5,29.27) 47.1,29.87 v1(47.1,32.9) ; v1(51.7,46.8) 58.6,46.8 62.19,43.21 v1(62.19,43.2)
GPIO10: C3.2 DS18.3 U1.16 | length 54.7
  Top Layer w0.4: v1(43.676,21.924) 40.4,25.2 40.4,34.7 46.125,40.425 U1.16 ; DS18.3 v1(61.428,10.072)
  Bottom Layer w0.4: v1(43.676,21.924) 47.676,21.924 59.528,10.072 v1(61.428,10.072) ; C3.2 61.428,6.814 DS18.3
GPIO18: R1.2 RA.14 RF.2 U1.26 U485.6 | length 79.6
  Top Layer w0.4: RA.14 31.9,48 v1(32.4,48) 32.4,46.717 32.9,46.217 32.9,41.4 30.342,38.842 30.342,20.197 U485.6 30,17.207 30,12.2 32.79,9.41 36.205,9.41 37.525,10.73 RF.2 ; v1(52.515,44.113) 52.528,44.1 54.906,44.1 56.646,42.361 R1.2
  Bottom Layer w0.4: v1(32.4,48) 48.5,48 52.387,44.113 v1(52.515,44.113)
GPIO19: R2.2 U1.27 U485.5 | length 49.4
  Top Layer w0.4: U485.5 34.4,19.07 v1(34.4,27) ; U1.27 56.638,44.9 R2.2
  Bottom Layer w0.4: v1(34.4,27) 37.4,27 44.3,33.9 53,33.9 53.8,34.7 53.8,37.3 56.5,40 56.5,43.4 v1(55,44.9)
Net485_2: 485.2 RS485.5 | length 42.1
  Bottom Layer w0.4: 485.2 38.68,2.92 67.16,2.92 68.48,4.24 68.48,7.08 72.1,10.7 RS485.5
Net485_3: 485.3 RS485.3 | length 52.8
  Bottom Layer w0.4: 485.3 36.86,2.2 67.6,2.2 69.2,3.8 69.2,6.3 73.8,10.9 73.8,16.4 73.09,17.11 72.29,17.11 RS485.3
NetAMS2_3: AMS2.3 C12.1 D1.2 | length 20
  Top Layer w0.4: C12.1 51.097,23.103 51.097,22.203 53.134,20.166 53.134,19.466 AMS2.3 55.6,19.3 55.891,19.591 55.891,25.831 57.18,27.119 57.18,29.52 D1.2
NetBT1_1: BT1.1 D2.2 U4.14 | length 27.7
  Top Layer w0.4: v1(20.1,31.7) 20.115,31.685 U4.14 20.115,26.785 22.8,24.1 26.477,24.1 28.7,21.877 28.7,17.4 26.458,15.158 25.718,15.158 25.068,14.508 D2.2
  Bottom Layer w0.4: v1(20.1,31.7) 20.1,34 BT1.1
NetBT_1-: 
NetBT_2+: 
NetC11_1: C11.1 U3.4 | length 4.4
  Top Layer w0.4: C11.1 60.99,13.048 U3.4
NetD2_1: D2.1 R7.1 | length 4.4
  Top Layer w0.4: D2.1 25.068,10.508 25.718,11.158 27.056,11.158 28.204,12.305 R7.1
NetL1_1: L1.1 R8.1 | length 2.2
  Top Layer w0.4: L1.1 10.154,27.54 R8.1
NetQ1_1: Q1.1 R10.2 | length 2.7
  Top Layer w0.4: R10.2 50.795,27.179 Q1.1
NetQ2_1: Q2.1 R12.2 | length 2.4
  Top Layer w0.4: Q2.1 42.555,30.971 R12.2
NetR4_2: R4.2 U2.3 | length 11.1
  Top Layer w0.4: R4.2 12.932,11.572 16.547,7.957 18.702,7.957 20.242,9.497 U2.3
NetR4_3: R4.3 U2.2 | length 9.6
  Top Layer w0.4: R4.3 13.082,12.44 16.845,8.677 18.152,8.677 18.972,9.497 U2.2
NetR4_4: R4.4 U2.1 | length 7.3
  Top Layer w0.4: R4.4 12.985,13.556 16.443,10.097 U2.1
NetR6_1: R6.1 U4.3 | length 10.5
  Top Layer w0.4: R6.1 15.391,15.791 17.4,17.8 18.482,17.8 20.115,19.433 U4.3
NetR6_2: R6.2 U4.1 | length 7.5
  Top Layer w0.4: R6.2 11.868,16.9 15.006,16.9 17.575,19.469 U4.1
RTS: Q1.2 R12.1 U3.14 | length 21.1
  Top Layer w0.4: R12.1 47.183,31.261 47.52,31.598 Q1.2 52.498,31.598 v1(52.5,31.6) ; v1(59.6,26.4) 59.6,23.77 U3.14
  Bottom Layer w0.4: v1(52.5,31.6) 52.5,29.6 55.7,26.4 v1(59.6,26.4)
RXD: R22.1 U3.3 | length 40.3
  Top Layer w0.4: R22.1 v4(62.4,50.2) ; v1(59.7,19.3) 59.7,17.17 U3.3
  Bottom Layer w0.4: v1(59.7,19.3) 61.8,19.3 63.7,21.2 63.7,48.9 v4(62.4,50.2)
TXD: R21.1 U3.2 | length 36.8
  Top Layer w0.4: U3.2 58.45,19.65 v1(58.6,19.8) ; R21.1 60.946,47.554 v4(61,47.5)
  Bottom Layer w0.4: v1(58.6,19.8) 59.3,20.5 61.2,20.5 62.98,22.28 62.98,45.786 61.606,47.16 61.576,47.16 61.235,47.5 v4(61,47.5)
U0RXD: R21.2 U1.30 | length 3.1
  Top Layer w0.4: U1.30 56.392,47.3 R21.2
U0TXD: R22.2 U1.31 | length 3.9
  Top Layer w0.4: U1.31 54.646,48.1 56.646,50.1 R22.2
V_SIM_7V: P_IN.5
VBUS: D1.1 U3.16 USB1.1 | length 16.5
  Top Layer w0.4: U3.16 57.18,25.78 59.2,27.8 60.866,27.8 61.1,28.034 D1.1 63.4,29.6 64.7,28.3 67.5,28.3 67.734,28.534 USB1.1@67.734,29.257
VCC_3V3MCU: AMS2.2 AMS2.4 BH1750.5 C1.1 C2.1 C3.1 C4.1 C5.1 C16.1 C17.1 DS18.2 P_IN.2 R3.1 R4.5 R4.6 R4.7 R4.8 R5.2 R6.5 R6.6 R6.7 R6.8 R7.2 R8.2 R20.2 R30.2 RA.3 RF.8 U1.3 U2.8 U4.2 | length 224.1
  Top Layer w0.4: 10.285,14.673 15.292,14.673 16.115,15.497 U2.8@17.61,15.497 ; R20.2 R5.2 36.204,42.922 36.204,43.927 36.772,44.494 37.646,45.368 37.646,45.503 C1.1 37.647,46.302 37.647,46.853 36.543,47.957 36.543,48.361 R30.2 36.543,49.161 36.543,49.643 37.646,50.746 37.646,51.303 C2.1 38.06,51.689 39.011,51.689 41,49.7 U1.3
  Top Layer w0.6: P_IN.2 8.45,18.51 9.985,18.51 R6.5@10.285,18.81 ; R4.8 R4.5 10.285,14.673 R6.8 R6.5@10.285,18.81 ; RA.3 14.4,48 15.7,46.7 15.7,38.7 12.054,35.054 R8.2 12.094,29.4 v3(13.9,29.4) ; U2.8@17.61,15.497 U2.8@17.702,15.589 ; U2.8 U2.8@17.702,15.589 ; U4.2 18.845,20.951 15.396,24.4 v3(13.9,24.4) 12.134,24.4 C17.1 12.046,24.408 C16.1 12.046,21.303 10.585,19.843 10.585,19.19 R6.5 R6.5@10.285,18.81 ; R7.2 28.083,13.985 27.151,13.985 26.8,13.633 26.8,12.551 26.449,12.2 19.6,12.2 17.702,14.098 U2.8@17.702,15.589 ; RF.8 36.143,14.423 R20.2 ; BH1750.5 46.2,5.48 46.2,12.7 v3(47.5,14) ; C5.1 51.551,10.7 C4.1 49.6,11.9 v3(47.5,14) ; AMS2.2 AMS2.4 v3(47.5,14)
  Bottom Layer w0.6: v3@13.861,29.4 27.7,29.4 34.99,22.11 RF.8 34.995,13.27 36.415,14.69 44.91,14.69 45.6,14 v3(47.5,14) 52.7,14 58.1,8.6 64.408,8.6 64.642,8.366 R3.1@64.642,6.897 ; v3(13.9,24.4) v3(13.9,29.4) ; C3.1 R3.1@64.642,6.897 ; DS18.2 63.968,4.91 64.642,5.585 R3.1@64.642,6.897
VCC_5VPW: P_IN.1 SHT.4 Soil.2 U485.4 | length 39.3
  Bottom Layer w0.4: P_IN.1 8.06,11.66 SHT.4 9.38,3.18 22.48,3.18 Soil.2 23.8,5.908 U485.4
pads on no net: C15.1 R4.1 RA.5 RA.6 RA.7 RA.8 RA.10 RA.11 RF.6 RS485.1 RS485.2 RS485.4 U1.4 U1.7 U1.9 U1.10 U1.15 U1.17 U1.24 U1.25 U1.28 U1.29 U1.32 U1.33 U1.34 U1.35 U3.7 U3.8 U3.9 U3.10 U3.11 U3.12 U3.15 U4.4
copper on no net:
  other v2: 3,4.2 72.1,4.2 3,51.3 72.1,51.3
  other v5: 20.195,39.121 20.2,46.726

## Polygon pours and split planes (outlines as drawn)
GND on Top Layer "GND_L01_P000" (solid, pour order 0): 1,1.4 74.1,1.4 74.1,54.2 1,54.2
GND on Bottom Layer "GND_L02_P001" (solid, pour order 1): 1,54.2 1,1.4 74.1,1.4 74.1,54.2

## Keep-outs
Keep-Out Layer:
  lines w0.254: 72.846,0.001 ccw(c72.9,2.1) 74.999,2.046 ; 72.9,0 2,0 cw(c2,2) 0,2 0,53 cw(c2,53) 2,55 73,55 cw(c73,53) 75,53 75,2.047

## Silkscreen, mask and mechanical layers (free items; w line width, h text height)
Top Overlay:
  text "PlantCare V1.0" at 6.646,29.154 h1.52 r90

## Text inside footprints (layer, text, board x,y; h text height)
U3: Top Overlay "16" at 56.545,23.55 h0.89 r90; Top Overlay "9" at 67.509,24.278 h0.89 r90; Top Overlay "8" at 67.632,16.384 h0.89 r90; Top Overlay "1" at 56.672,16.311 h0.89 r90